# Altium PCB motors1.PcbDoc
Units mm, origin at the board's own origin, x right, y up, seen from the top; angles counter-clockwise.
Board outline 49.91 x 49.91 mm, 2 copper layers (Top Layer, Bottom Layer); 30 components, 25 nets, 102 pads, 0 vias.
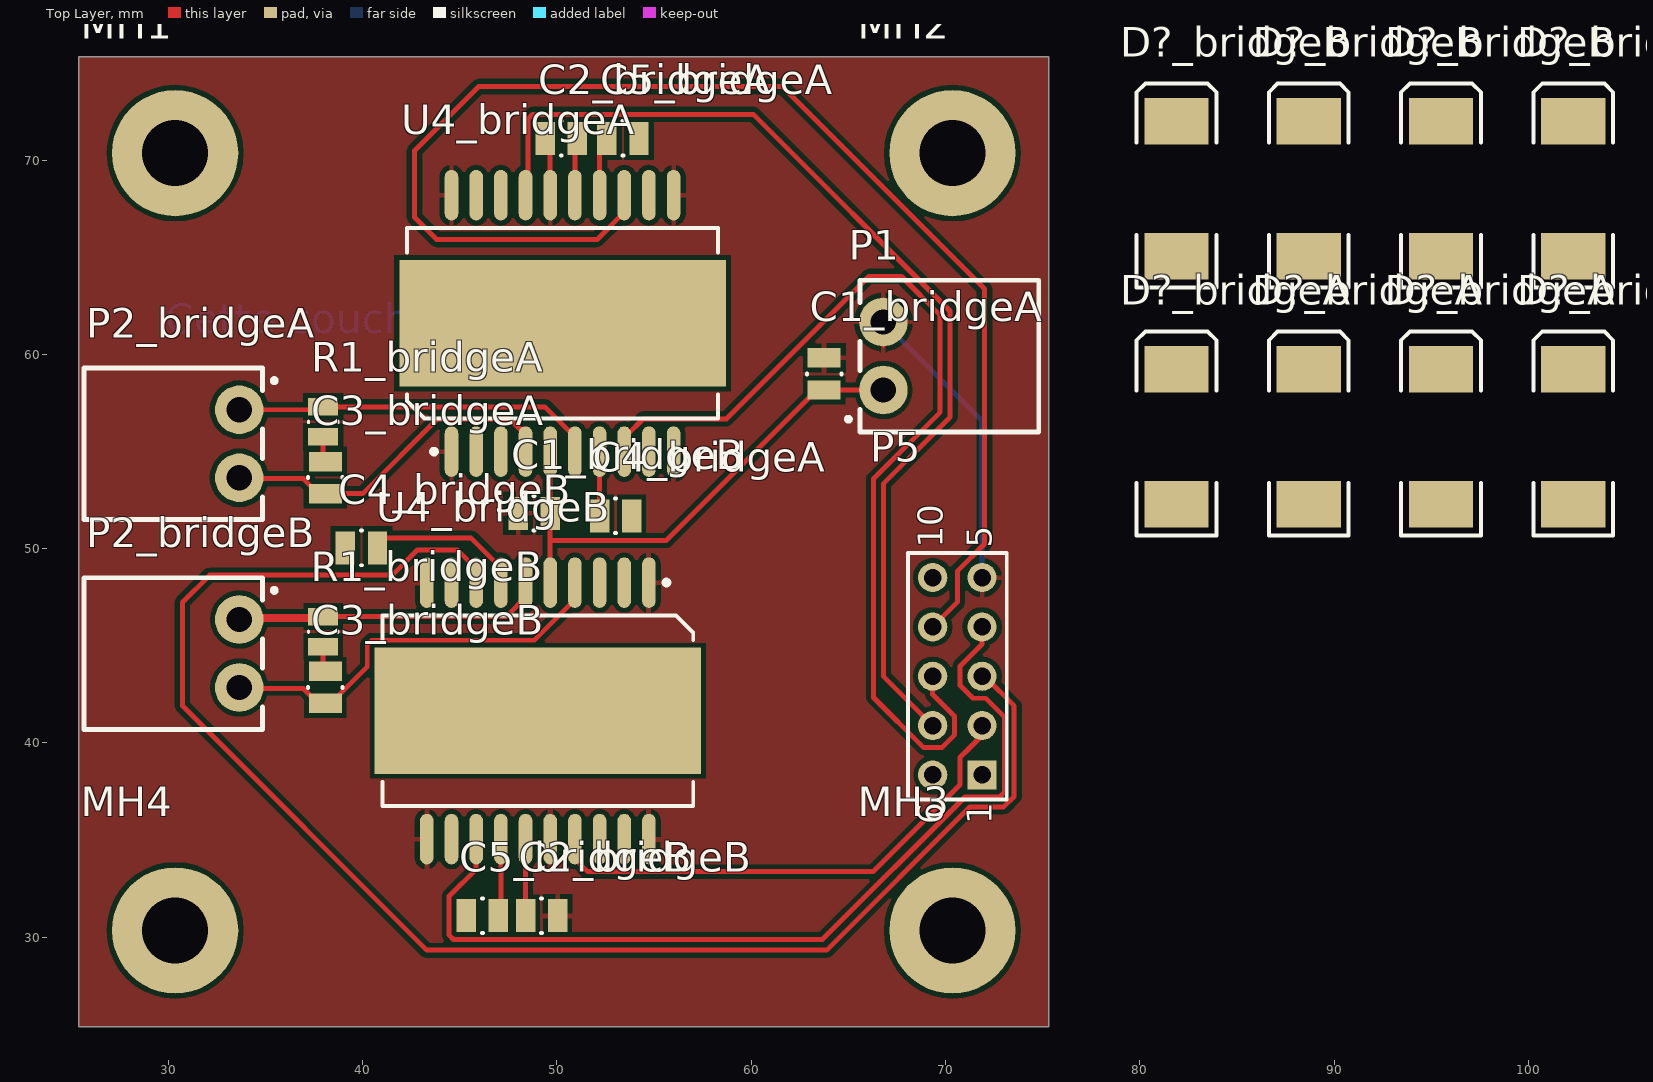
[diagram p0: Top Layer view]
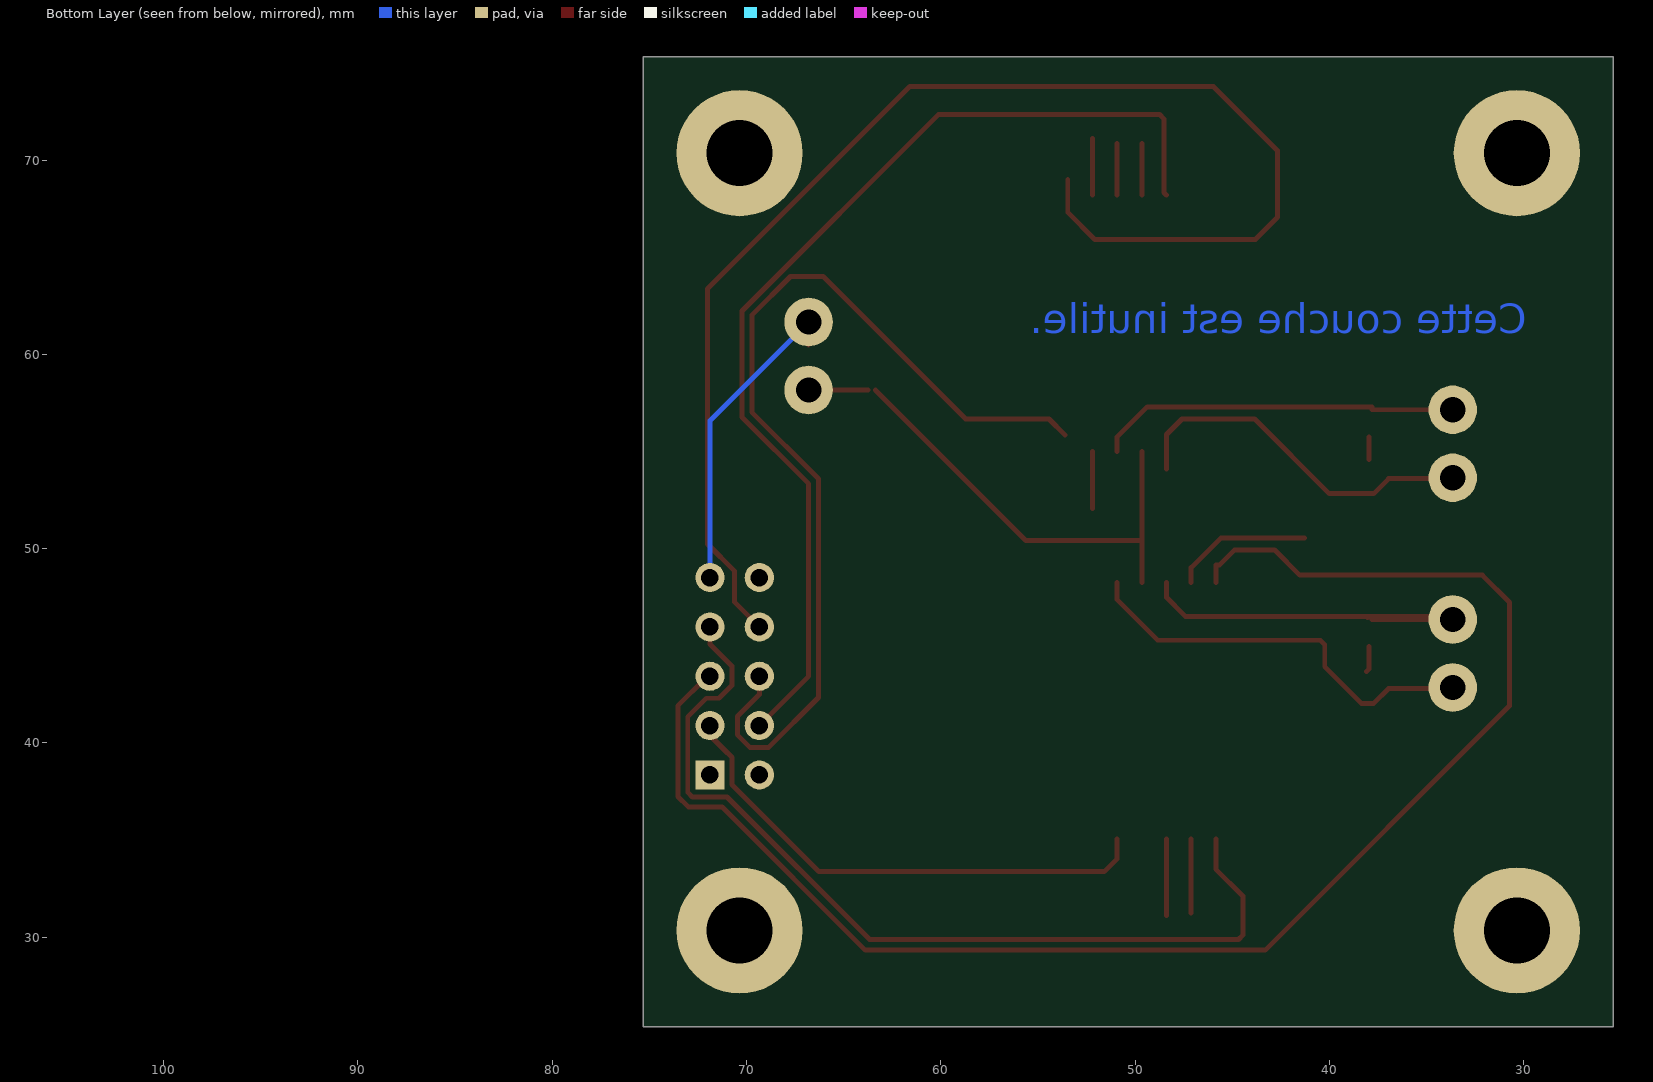
[diagram p1: Bottom Layer view, seen from below]

## Layer stack, top to bottom
Top Layer: signal copper 0.0356
Dielectric: dielectric 0.32, FR-4, Dk 4.8
Bottom Layer: signal copper 0.0356

## Board outline
25.4,25.4 75.311,25.4 75.311,75.311 25.4,75.311

## Design rules (kind name [scope] priority, off if disabled: settings)
Clearance [All] p1: gap=0.254
PolygonConnect [All] p1: connectstyle=Relief reliefconductorwidth=0.254 reliefentries=4 polygonreliefangle="90 Angle"
RoutingVias [All] p1: holewidth=0.711 width=1.27 viastyle="Through Hole" minholewidth=0.711 minwidth=1.27 maxholewidth=0.711 maxwidth=1.27
SilkscreenOverComponentPads [All] p1: minsilkscreentomaskgap=0.254
SolderMaskExpansion [All] p1: expansion=0.102
Width [All] p1: maxlimit=0.254 minlimit=0.254 preferedwidth=0.254
27 further rules are at their usual default settings.

## Classes and differential pairs
channel class motors1-bridge: bridgeA bridgeB
component class motors1: MH1 MH2 MH3 MH4 P1
component class bridgeB: C1_bridgeB C2_bridgeB C3_bridgeB C4_bridgeB C5_bridgeB D?_bridgeB P2_bridgeB R1_bridgeB
component class bridgeA: C1_bridgeA C2_bridgeA C3_bridgeA C4_bridgeA C5_bridgeA D?_bridgeA P2_bridgeA R1_bridgeA U4_bridgeA

## Components (designator, comment, footprint, x,y, rotation, side; value= is the part's Value field where it differs from the comment)
C1_bridgeA "CAP" C0805C 63.754,59.817 r270 top (schematic designator C1)
C1_bridgeB "CAP" C0805C 48.006,51.816 r0 top (schematic designator C1)
C2_bridgeA "CAP" C0805C 49.403,71.12 r0 top (schematic designator C2)
C2_bridgeB "CAP" C0805C 50.038,31.115 r180 top (schematic designator C2)
C3_bridgeA "CAP" C0805C 38.085,54.483 r270 top (schematic designator C3)
C3_bridgeB "CAP" C0805C 38.085,43.688 r270 top (schematic designator C3)
C4_bridgeA "CAP" C0805C 52.197,51.689 r0 top (schematic designator C4)
C4_bridgeB "CAP" C0805C 40.767,50.038 r180 top (schematic designator C4)
C5_bridgeA "CAP" C0805C 52.578,71.12 r0 top (schematic designator C5)
C5_bridgeB "CAP" C0805C 46.99,31.115 r180 top (schematic designator C5)
D?_bridgeA "Diode" DSO-C2/X3.3 95.504,55.753 r90 top (schematic designator D?)
D?_bridgeA "Diode" DSO-C2/X3.3 81.89,55.753 r90 top (schematic designator D?)
D?_bridgeA "Diode" DSO-C2/X3.3 102.311,55.753 r90 top (schematic designator D?)
D?_bridgeA "Diode" DSO-C2/X3.3 88.697,55.753 r90 top (schematic designator D?)
D?_bridgeB "Diode" DSO-C2/X3.3 95.504,68.516 r90 top (schematic designator D?)
D?_bridgeB "Diode" DSO-C2/X3.3 102.311,68.516 r90 top (schematic designator D?)
D?_bridgeB "Diode" DSO-C2/X3.3 81.89,68.516 r90 top (schematic designator D?)
D?_bridgeB "Diode" DSO-C2/X3.3 88.697,68.516 r90 top (schematic designator D?)
MH1 "Screw" SCREW 30.353,70.358 r0 top
MH2 "Screw" SCREW 70.358,70.358 r0 top
MH3 "Screw" SCREW 70.358,30.353 r0 top
MH4 "Screw" SCREW 30.353,30.353 r0 top
P1 "+30V" TERM2W-3.5 66.802,58.166 r90 top
P2_bridgeA "Motor" TERM2W-3.5 33.655,57.15 r270 top (schematic designator P2)
P2_bridgeB "Motor" TERM2W-3.5 33.655,46.355 r270 top (schematic designator P2)
P5 "IDC 10/Motors" HDR2X5_CEN 71.882,38.354 r90 top
R1_bridgeA "10R" C0805R 37.973,55.753 r90 top (schematic designator R1)
R1_bridgeB "10R" C0805R 37.973,44.958 r90 top (schematic designator R1)
U4_bridgeA "L6201P" PowerSO20_M 50.292,61.595 r90 top (schematic designator U4)
U4_bridgeB "L6201P" PowerSO20_M 49.022,41.656 r270 top (schematic designator U4)

## Footprints (in the part's own frame and the unit in brackets; to place one, negate y for a bottom-side part, rotate by r counter-clockwise, add the part's x,y. Pads: shape width x height; smd on the part's side, far side on the other; paste and mask are expansions set on the pad)
C0805C [mm]
  rect 1x1.7 smd: 1(0,0) 2(1.65,0)
  silkscreen extent 0.8,-0.89 0.85,0.89, body extent -0.21,-0.61 1.79,0.64, height 0.78
C0805R [mm]
  rect 0.9x1.55 smd: 1(0,0) 2(1.55,0)
  silkscreen extent 0.73,-0.76 0.81,0.76, body extent -0.24,-0.62 1.76,0.63, height 0.78
DSO-C2/X3.3 [mm] "DO-214-AB/SMC; 2 C-Bend Leads; Body 7.9 x 5.9 mm, inc. leads (LxW)"
  rect 2.4x3.3 smd: A(-3.475,0) K(3.475,0)
  silkscreen extent -5.07,-2.05 5.43,2.05, body extent -4.06,-3.15 4.06,3.15, height 2.67
HDR2X5_CEN [mm] "Connector; Header; 5x2 Position"
  rect 1.5x1.5 hole 0.9: 1(0,0)
  round 1.5 hole 0.9: 2(2.54,0) 3(5.08,0) 4(7.62,0) 5(10.16,0) 6(0,2.54) 7(2.54,2.54) 8(5.08,2.54) 9(7.62,2.54) 10(10.16,2.54)
  silkscreen extent -1.27,-1.27 11.43,3.81, body extent -5.15,-3.3 15.35,6, height 2.2
PowerSO20_M [mm] "SOP, 20-Leads, Body 15.9x11mm, Pitch 1.27mm, IPC Low Density"
  oval 2.6x0.7 smd: 1(-6.6,5.715) 2(-6.6,4.445) 3(-6.6,3.175) 4(-6.6,1.905) 5(-6.6,0.635) 6(-6.6,-0.635) 7(-6.6,-1.905) 8(-6.6,-3.175) 9(-6.6,-4.445) 10(-6.6,-5.715) 11(6.6,-5.715) 12(6.6,-4.445) 13(6.6,-3.175) 14(6.6,-1.905) 15(6.6,-0.635) 16(6.6,0.635) 17(6.6,1.905) 18(6.6,3.175) 19(6.6,4.445) 20(6.6,5.715)
  rect 6.5x16.8 smd: 21(0,0)
  silkscreen extent -6.72,-8 4.9,8, body extent -7.2,-8 7.2,8, height 3.6
SCREW [mm] "Mounting Hole M3"
  round 6.5 hole 3.4: 1(0,0)
  body extent -2.89,-2.52 2.89,2.52, height 10
TERM2W-3.5 [mm] "Horizontal Terminal Block, 2 ways, 3.5mm; Model 20.155MH/2"
  round 2.5 hole 1.3: 1(0,0) 2(3.5,0)
  silkscreen extent -2.15,-8 5.65,1.9, body extent -2.45,-8 5.95,1.2, height 7.25

## Part data
C1_bridgeA C1_bridgeB C2_bridgeA C2_bridgeB C3_bridgeA C3_bridgeB C4_bridgeA C4_bridgeB C5_bridgeA C5_bridgeB: "Capacitor"
D?_bridgeA D?_bridgeA D?_bridgeA D?_bridgeA D?_bridgeB D?_bridgeB D?_bridgeB D?_bridgeB: "Default Diode"
MH1 MH2 MH3 MH4: "Mounting Hole for M3 Screws"
P1 P2_bridgeA P2_bridgeB: library part "Header 2", "Header, 2-Pin"
P5: library part "IDC 10", "Header, 5-Pin, Dual row"
R1_bridgeA R1_bridgeB: library part RES2
U4_bridgeA U4_bridgeB: "DMOS Full Bridge Driver"

## Nets (pads, with @x,y where several pads share a name; then routed paths per layer and width w, separated by ;. In a path a pad name is that pad's centre, name@x,y a point inside that pad or via, vN(x,y) a via of type N, cw(c..) or ccw(c..) an arc to the next point about the centre after c; other vN are vias at no path point)
+3V3: P5.10
+30V: C1_bridgeA.2 C1_bridgeB.2 P1.1 U4_bridgeA.5 U4_bridgeB.5 | length 26.7
  Top Layer w0.254: U4_bridgeB.5 49.657,50.419 ; U4_bridgeA.5 49.657,50.419 ; C1_bridgeA.2@63.373,58.166 55.626,50.419 49.657,50.419 ; C1_bridgeA.2 P1.1
GND: C1_bridgeA.1 C1_bridgeB.1 C2_bridgeA.1 C2_bridgeB.1 P1.2 P5.5 U4_bridgeA.1 U4_bridgeA.10 U4_bridgeA.11 U4_bridgeA.16 U4_bridgeA.20 U4_bridgeB.1 U4_bridgeB.10 U4_bridgeB.11 U4_bridgeB.16 U4_bridgeB.20 | length 19.1
  Top Layer w0.254: U4_bridgeA.16 C2_bridgeA.1@49.657,70.866 ; P1.2@66.802,60.473 P1.2
  Bottom Layer w0.254: P1.2 71.882,56.586 P5.5
NetC2_bridgeA_2: C2_bridgeA.2 U4_bridgeA.15 | length 2.7
  Top Layer w0.254: U4_bridgeA.15 C2_bridgeA.2@50.927,70.866
NetC2_bridgeB_2: C2_bridgeB.2 U4_bridgeB.15 | length 3.9
  Top Layer w0.254: C2_bridgeB.2 U4_bridgeB.15
NetC3_bridgeA_1: C3_bridgeA.1 R1_bridgeA.1 | length 1.2
  Top Layer w0.254: C3_bridgeA.1@37.973,54.595 R1_bridgeA.1
NetC3_bridgeB_1: C3_bridgeB.1 R1_bridgeB.1 | length 1.3
  Top Layer w0.254: R1_bridgeB.1 37.973,43.8 C3_bridgeB.1
NetC4_bridgeA_1: C4_bridgeA.1 U4_bridgeA.7 | length 2.9
  Top Layer w0.254: C4_bridgeA.1@52.197,52.07 U4_bridgeA.7
NetC4_bridgeB_1: C4_bridgeB.1 U4_bridgeB.7 | length 7.2
  Top Layer w0.254: 41.275,50.546 45.593,50.546 47.117,49.022 U4_bridgeB.7
NetC5_bridgeA_1: C5_bridgeA.1 U4_bridgeA.14 | length 2.9
  Top Layer w0.254: U4_bridgeA.14 C5_bridgeA.1@52.197,71.12
NetC5_bridgeB_1: C5_bridgeB.1 U4_bridgeB.14 | length 3.8
  Top Layer w0.254: C5_bridgeB.1@47.117,31.242 U4_bridgeB.14
NetP5_2: P5.2 U4_bridgeB.17 | length 26.5
  Top Layer w0.254: U4_bridgeB.17 50.927,34.036 51.588,33.375 66.268,33.375 70.751,37.858 70.751,39.262 70.974,39.485 70.981,39.485 71.882,40.386 P5.2
NetP5_3: P5.3 U4_bridgeB.8 | length 81.1
  Top Layer w0.254: U4_bridgeB.8 45.847,49.149 45.668,49.149 44.88,49.937 42.825,49.937 41.529,48.641 32.131,48.641 30.734,47.244 30.734,41.91 43.307,29.337 63.881,29.337 71.259,36.715 73,36.715 73.533,37.248 73.533,41.91 72.136,43.307 P5.3@72.136,43.688
NetP5_4: P5.4 U4_bridgeB.13 | length 47.6
  Top Layer w0.254: U4_bridgeB.13 45.847,33.511 44.459,32.123 44.459,30.107 44.682,29.884 63.666,29.884 71.005,37.223 72.79,37.223 73.025,37.458 73.025,41.35 72.072,42.303 71.414,42.303 70.751,42.966 70.751,43.954 71.882,45.085 P5.4
NetP5_7: P5.7 U4_bridgeA.17 | length 53.8
  Top Layer w0.254: U4_bridgeA.17 48.522,68.33 48.522,72.128 48.745,72.351 60.11,72.351 70.231,62.23 70.231,56.769 66.802,53.34 66.802,43.434 P5.7
NetP5_8: P5.8 U4_bridgeA.8 | length 50.4
  Top Layer w0.254: U4_bridgeA.8@53.616,55.858 54.434,56.676 58.724,56.676 66.056,64.008 67.735,64.008 69.723,62.02 69.723,57.023 66.294,53.594 66.294,42.343 68.874,39.763 69.81,39.763 70.473,40.426 70.473,41.362 69.342,42.493 P5.8
NetP5_9: P5.9 U4_bridgeA.13 | length 70.5
  Top Layer w0.254: U4_bridgeA.13@53.467,69 U4_bridgeA.13 53.467,67.31 52.07,65.913 43.815,65.913 42.672,67.056 42.672,70.485 45.974,73.787 61.595,73.787 72.009,63.373 72.009,50.24 70.612,48.843 70.612,47.244 P5.9
OUT1_bridgeA: P2_bridgeA.1 R1_bridgeA.2 U4_bridgeA.6 | length 18.7
  Top Layer w0.254: P2_bridgeA.1 R1_bridgeA.2@37.82,57.15 ; R1_bridgeA.2@37.82,57.303 49.377,57.303 50.927,55.753 U4_bridgeA.6
OUT1_bridgeB: P2_bridgeB.1 R1_bridgeB.2 U4_bridgeB.6 | length 19.2
  Top Layer w0.254: P2_bridgeB.1 R1_bridgeB.2@37.82,46.355 ; P2_bridgeB.1@34.544,46.508 47.397,46.508 ; R1_bridgeB.2 R1_bridgeB.2@38.033,46.448 ; 47.464,46.575 48.387,47.498 U4_bridgeB.6
OUT2_bridgeA: C3_bridgeA.2 P2_bridgeA.2 U4_bridgeA.4 | length 18.8
  Top Layer w0.254: P2_bridgeA.2 33.703,53.602 36.949,53.602 37.718,52.833 C3_bridgeA.2 40.006,52.833 43.849,56.676 47.591,56.676 48.387,55.88 U4_bridgeA.4 U4_bridgeA.4@48.387,54.102
OUT2_bridgeB: C3_bridgeB.2 P2_bridgeB.2 U4_bridgeB.4 | length 21.4
  Top Layer w0.254: P2_bridgeB.2 33.703,42.807 36.949,42.807 37.718,42.038 C3_bridgeB.2 38.355,42.038 40.241,43.924 40.241,45.064 40.464,45.287 48.843,45.287 50.927,47.371 U4_bridgeB.4
OUTA1_bridgeA: C4_bridgeA.2
OUTA1_bridgeB: C4_bridgeB.2
OUTA2_bridgeA: C5_bridgeA.2
OUTA2_bridgeB: C5_bridgeB.2
pads on no net: D?_bridgeA.A D?_bridgeA.K D?_bridgeB.A D?_bridgeB.K MH1.1 MH2.1 MH3.1 MH4.1 P5.1 P5.6 U4_bridgeA.2 U4_bridgeA.3 U4_bridgeA.9 U4_bridgeA.12 U4_bridgeA.18 U4_bridgeA.19 U4_bridgeA.21 U4_bridgeB.2 U4_bridgeB.3 U4_bridgeB.9 U4_bridgeB.12 U4_bridgeB.18 U4_bridgeB.19 U4_bridgeB.21

## Polygon pours and split planes (outlines as drawn)
GND on Top Layer "Top Layer-No Net" (solid, remove dead copper, pour order 2): 25.4,75.311 75.311,75.311 75.311,25.4 25.4,25.4 25.4,75.311

## Other copper
Bottom Layer:
  text "Cette couche est inutile." at 29.845,61.087 h1.52

## Silkscreen, mask and mechanical layers (free items; w line width, h text height)
Mechanical 1:
  the board outline again, w0.254

## Text inside footprints (layer, text, board x,y; h text height)
P5: Top Overlay "1" at 72.39,35.814 h1.27 r90; Top Overlay "5" at 72.39,50.038 h1.27 r90; Top Overlay "10" at 69.85,50.038 h1.27 r90; Top Overlay "6" at 69.85,35.814 h1.27 r90